# EAGLE board Stackduino-1.2 (EAGLE 7.3.0)
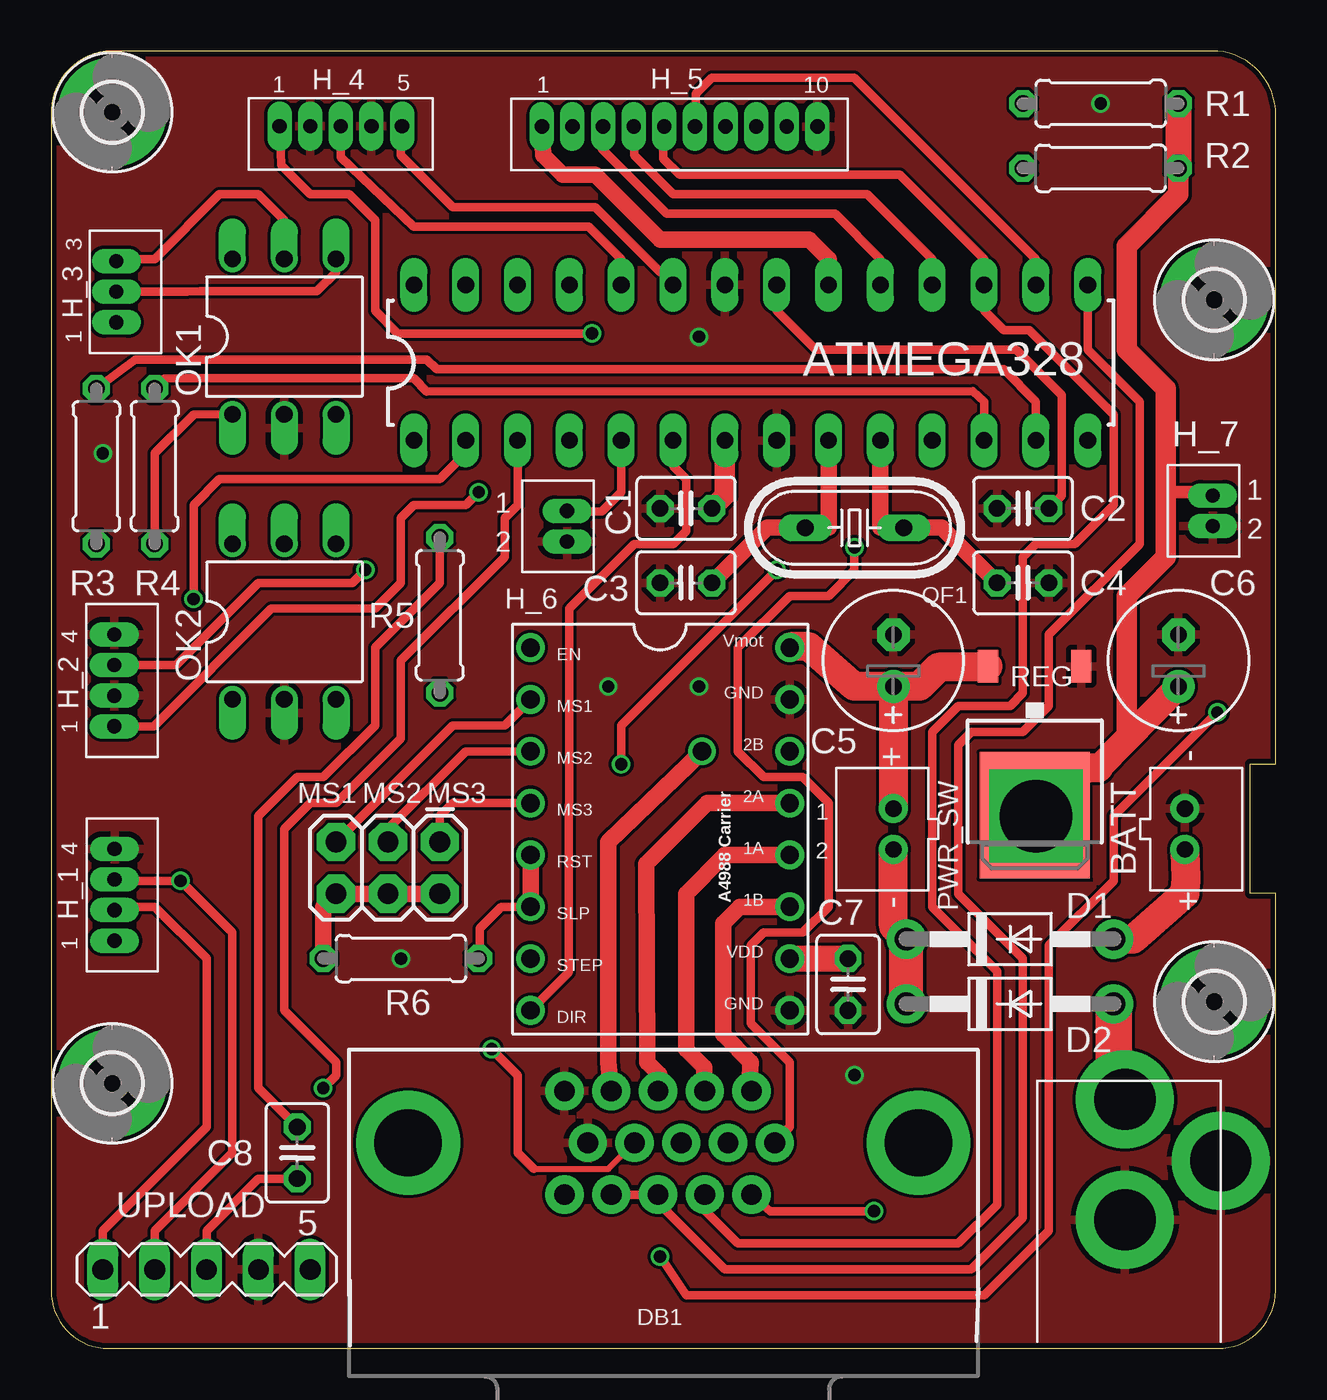
[diagram p0: board, top side]
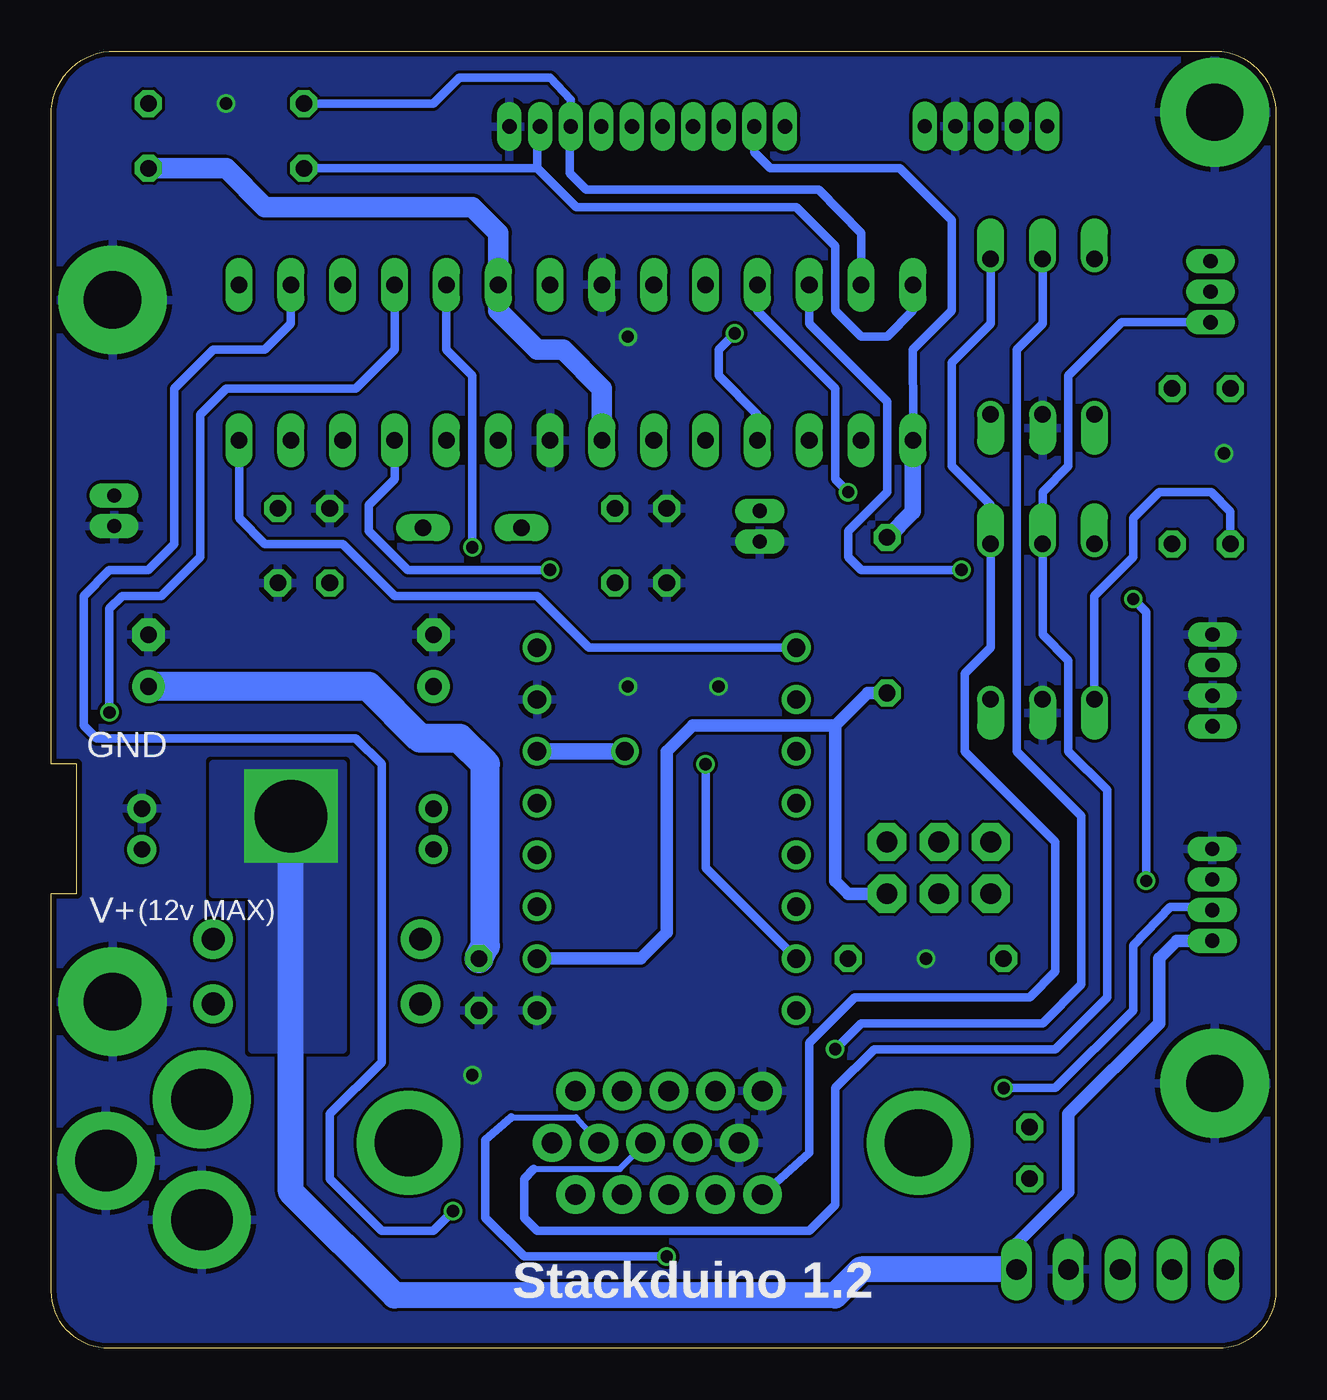
[diagram p1: board, bottom side, seen from below]

Size 60.01 x 63.6 mm. Coordinates in mm from the lower left corner, seen from the top.
Outline: 0,60.46 0,2.83 arc90 2.83,0 57.17,0 arc90 60,2.83 60,22.31 58.75,22.31 58.75,28.65 60,28.65 60,60.17 arc90 57.17,63.6 2.94,63.6 arc90 0,60.46
Copper layers (1*16): Top 0.035mm / dielectric 1.5mm / Bottom 0.035mm
Design rules "SeeedStudio_2layer_DRU_no_angle_20140221": minimum track width 6mil, minimum drill 12mil, track to track 6mil, track to pad 6mil, pad to pad 6mil, via to via 6mil, smd to smd 0mil, copper to edge 10mil, drill to drill 10mil, minimum pad ring 10mil, minimum via ring 6mil, stop-mask expansion 2mil, vias tented up to drill 100mil, thermal gap 10mil
bKeepout: area 45.7,22.9 to 51.4,28.6

## Footprints (pad centres in the part's own frame; a part is rotated, then mirrored left to right if it is on the bottom)
A4988BREAKOUT = drill 0.9: 1A 8.89,1.27; 1B 11.43,1.27; 2A 6.35,1.27; 2B 3.81,1.27; DIR 16.51,-11.43; EN -1.27,-11.43; GND 16.51,1.27; GND@0 1.27,1.27; MS1 1.27,-11.43; MS2 3.81,-11.43; MS3 6.35,-11.43; RST 8.89,-11.43; SLP 11.43,-11.43; STEP 13.97,-11.43; VDD 13.97,1.27; VMOT -1.27,1.27
DIL28-3 = drill 0.813 long: 1 -16.51,-3.81; 2 -13.97,-3.81; 3 -11.43,-3.81; 4 -8.89,-3.81; 5 -6.35,-3.81; 6 -3.81,-3.81; 7 -1.27,-3.81; 8 1.27,-3.81; 9 3.81,-3.81; 10 6.35,-3.81; 11 8.89,-3.81; 12 11.43,-3.81; 13 13.97,-3.81; 14 16.51,-3.81; 15 16.51,3.81; 16 13.97,3.81; 17 11.43,3.81; 18 8.89,3.81; 19 6.35,3.81; 20 3.81,3.81; 21 1.27,3.81; 22 -1.27,3.81; 23 -3.81,3.81; 24 -6.35,3.81; 25 -8.89,3.81; 26 -11.43,3.81; 27 -13.97,3.81; 28 -16.51,3.81
JST-PH-2-THM = drill 0.8 pad 1.422: 1 1,0; 2 -1,0
C025-030X050 = drill 0.813 octagon: 1 -1.27,0; 2 1.27,0
E2,5-7 = drill 0.813 pad 1.6: + -1.27,0 | drill 0.813 pad 1.6 octagon: - 1.27,0
DO41-10 = drill 1.118 pad 1.93: A 5.08,0; C -5.08,0
DB15 = drill 1.016 pad 1.88: 1 -4.32,-7.62; 2 -2.03,-7.62; 3 0.26,-7.62; 4 2.55,-7.62; 5 4.84,-7.62; 6 -5.46,-5.08; 7 -3.17,-5.08; 8 -0.88,-5.08; 9 1.41,-5.08; 10 3.7,-5.08; 11 -4.32,-2.54; 12 -2.03,-2.54; 13 0.26,-2.54; 14 2.55,-2.54; 15 4.84,-2.54 | drill 3.302 pad 5.08: G1 -12.5,-5.08; G2 12.5,-5.08
PJ-102A = drill 3 pad 4.8: RING 0.1,-3.39; RING_SW -4.6,-6.29; TIP 0.1,-9.29
2,8-PAD = drill 2.8 pad 5.334: B2,8 0,0
B4B-ZR = drill 0.7 long: 1 6,-1.3; 2 4.5,-1.3; 3 3,-1.3; 4 1.5,-1.3
B3B-ZR = drill 0.7 pad 1.1 long: 1 -1.5,0; 2 0,0; 3 1.5,0
B5B-ZR = drill 0.7 long: 1 3,0.013; 2 1.5,0.013; 3 0,0.013; 4 -1.5,0.013; 5 -3,0.013
B10B-ZR = drill 0.7 long: 1 6.751,-0.005; 2 5.251,-0.005; 3 3.751,-0.005; 4 2.251,-0.005; 5 0.751,-0.005; 6 -0.749,-0.005; 7 -2.249,-0.005; 8 -3.749,-0.005; 9 -5.249,-0.005; 10 -6.749,-0.005
B2B-ZR = drill 0.7 pad 1.1 long: 1 0.92,-0.75; 2 2.42,-0.75
2X3 = drill 1.016 pad 1.88 octagon: 1 0,0; 2 0,2.54; 3 2.54,0; 4 2.54,2.54; 5 5.08,0; 6 5.08,2.54
DIL06 = drill 0.813 offset: 1 -2.54,-3.81; 2 0,-3.81; 3 2.54,-3.81; 4 2.54,3.81; 5 0,3.81; 6 -2.54,3.81
HC49U-V = drill 0.813 long: 1 -2.413,0; 2 2.413,0
0207/7 = drill 0.813 octagon: 1 -3.81,0; 2 3.81,0
DPACK = smd 1 x 1.6: 1 -2.28,-4.8; 3 2.28,-4.8 | smd 5.4 x 6.2: 2 0,2.5
MA05-1 = drill 1.016 long: 1 -5.08,0; 2 -2.54,0; 3 0,0; 4 2.54,0; 5 5.08,0

## Placement (x,y rotation side)
A4988_CARRIER  A4988BREAKOUT  [A4988BREAKOUT]  34.92,33.09 270 top
ATMEGA328  ATMEGA328P_PDIP  [DIL28-3]  34.29,48.33 0 top
BATT  [JST-PH-2-THM]  55.56,25.47 270 top
C1  0.1uF  [C025-030X050]  31.11,41.18 180 top
C2  0.1uF  [C025-030X050]  47.62,41.18 0 top
C3  22pF  [C025-030X050]  31.11,37.53 180 top
C4  22pF  [C025-030X050]  47.62,37.53 0 top
C5  100uF  [E2,5-7]  41.27,33.72 90 top
C6  100uF  [E2,5-7]  55.24,33.72 90 top
C7  0.1uF  [C025-030X050]  39.05,17.84 270 top
C8  0.1uF  [C025-030X050]  12.06,9.59 270 top
D1  20v 1A  [DO41-10]  46.99,20.07 0 top
D2  20v 1A  [DO41-10]  46.99,16.89 0 top
DB1  DB15  [DB15]  30,5 180 top
DC_SOCKET  2.1MMJACKTHM  [PJ-102A]  52.72,2.92 180 top
H1  MOUNT-PAD-ROUND2.8  [2,8-PAD]  3,60.6 180 top
H2  MOUNT-PAD-ROUND2.8  [2,8-PAD]  57,51.4 180 top
H3  MOUNT-PAD-ROUND2.8  [2,8-PAD]  57,17 180 top
H4  MOUNT-PAD-ROUND2.8  [2,8-PAD]  3,13 180 top
H_1  B4B-ZR  [B4B-ZR]  1.81,18.49 90 top
H_2  B4B-ZR  [B4B-ZR]  1.8,29 90 top
H_3  B3B-ZR  [B3B-ZR]  3.2,51.8 90 top
H_4  B5B-ZR  [B5B-ZR]  14.2,59.9 0 top
H_5  B10B-ZR  [B10B-ZR]  30.8,59.9 0 top
H_6  B2B-ZR  [B2B-ZR]  26.04,41.98 270 top
H_7  B2B-ZR  [B2B-ZR]  57.67,42.73 270 top
MS_PINS  [2X3]  19.05,24.83 180 top
OK1  4N35  [DIL06]  11.43,49.59 0 top
OK2  4N35  [DIL06]  11.43,35.62 0 top
PWR_SW  [JST-PH-2-THM]  41.27,25.47 90 top
QF1  8Mhz  [HC49U-V]  39.37,40.23 0 top
R1  4.7K  [0207/7]  51.44,61.03 180 top
R2  4.7K  [0207/7]  51.44,57.85 0 top
R3  220 Ohm  [0207/7]  2.22,43.24 90 top
R4  220 Ohm  [0207/7]  5.08,43.24 90 top
R5  10K  [0207/7]  19.05,35.94 270 top
R6  100K  [0207/7]  17.14,19.11 180 top
REG  MC33269D-5.0  [DPACK]  48.2,28.63 180 top
UPLOAD  [MA05-1]  7.62,3.88 0 top

## Library data of the parts
A4988_CARRIER = RepRapjr
ATMEGA328 = SparkFun-DigitalIC
BATT D1 D2 DC_SOCKET PWR_SW = adafruit
C1-C4 C7 C8 R1-R6 = resistor
C5 C6 = rcl
DB1 = SparkFun-Connectors
H1-H4 = holes
H_1-H_7 = jst-connectors
MS_PINS = SparkFun-Connectors; PROD_ID: CONN-09701
OK1 OK2 = optocoupler; MF: FAIRCHILD SEMICONDUCTOR; MPN: 4N35; OC_FARNELL: 1328375; OC_NEWARK: 72K9946
QF1 = crystal; OC_FARNELL: 1666969; OC_NEWARK: unknown
REG = linear
UPLOAD = con-lstb; OC_FARNELL: unknown; OC_NEWARK: unknown

## Nets
A4988_RESET: A4988_CARRIER.RST A4988_CARRIER.SLP R6.1
ACVIN: D2.A DC_SOCKET.TIP
BATTVIN: BATT.1 D1.A
BWD: ATMEGA328.26 H_2.2
CAM_GND: DB1.15 H_3.2 OK1.4 OK2.4
DIR: A4988_CARRIER.DIR ATMEGA328.6
ENABLE: A4988_CARRIER.EN ATMEGA328.14
ENC_A: ATMEGA328.23 H_4.1
ENC_B: ATMEGA328.24 H_4.3
ENCSWITCH: ATMEGA328.4 H_4.5
FWD: ATMEGA328.25 H_2.4
GND: A4988_CARRIER.GND A4988_CARRIER.GND@0 ATMEGA328.8 ATMEGA328.22 BATT.2 C1.2 C2.1 C3.2 C4.2 C5.- C6.- C7.2 DB1.5 DB1.10 DC_SOCKET.RING DC_SOCKET.RING_SW H1.B2,8 H2.B2,8 H3.B2,8 H4.B2,8 H_1.1 H_2.1 H_2.3 H_4.2 H_4.4 H_5.1 H_6.2 H_7.2 OK1.2 OK2.2 REG.1 UPLOAD.4
I2C_SCL: ATMEGA328.28 H_5.2 R2.1
I2C_SDA: ATMEGA328.27 H_5.3 R1.2
LIM1: ATMEGA328.15 DB1.13 DB1.14
MCU_RX: ATMEGA328.2 H_1.2 UPLOAD.2
MCU_TX: ATMEGA328.3 H_1.3 UPLOAD.1
MISO: ATMEGA328.18 DB1.7 H_5.7
MOSI: ATMEGA328.17 DB1.12 H_5.6
MS1: A4988_CARRIER.MS1 MS_PINS.5
MS2: A4988_CARRIER.MS2 MS_PINS.3
MS3: A4988_CARRIER.MS3 MS_PINS.1
N$2: D1.C D2.C PWR_SW.2
N$3: ATMEGA328.1 C8.1 H_5.9 R5.1
N$4: C8.2 UPLOAD.3
N$11: ATMEGA328.21 C2.2
OPT1: DB1.8 H_3.1 OK2.5
OPT1_IN: OK2.1 R3.1
OPT1_MCU: ATMEGA328.13 R3.2
OPT2: DB1.9 H_3.3 OK1.5
OPT2_IN: OK1.1 R4.1
OPT2_MCU: ATMEGA328.12 R4.2
OUT1A: A4988_CARRIER.1B DB1.1
OUT1B: A4988_CARRIER.1A DB1.2
OUT2A: A4988_CARRIER.2A DB1.3
OUT2B: A4988_CARRIER.2B DB1.4
SCK: ATMEGA328.19 DB1.6 H_5.8
SS: ATMEGA328.16 DB1.11 H_5.5
START_STOP: ATMEGA328.5 H_6.1
STEP: A4988_CARRIER.STEP ATMEGA328.11
VCC: A4988_CARRIER.VDD ATMEGA328.7 ATMEGA328.20 C1.1 C6.+ C7.1 H_1.4 H_5.10 H_7.1 MS_PINS.2 MS_PINS.4 MS_PINS.6 R1.1 R2.2 R5.2 R6.2 REG.2 UPLOAD.5
VIN: A4988_CARRIER.VMOT C5.+ PWR_SW.1 REG.3
XTAL1: ATMEGA328.9 C3.1 QF1.1
XTAL2: ATMEGA328.10 C4.1 QF1.2

## Tracks (layer width: path | path; a pad name or v marks a point on that pad's centre or on a via)
A4988_RESET
  Top 0.406: A4988_CARRIER.SLP 22.05,21.66 21,20.6 21,19.66 R6.1
  Top 0.813: A4988_CARRIER.RST A4988_CARRIER.SLP
ACVIN
  Top 1.778: DC_SOCKET.TIP 52.07,13.4 D2.A
BATTVIN
  Top 1.422: D1.A 53.02,20.07 55.56,22.3 55.62,22.94 55.6,23.87 BATT.1
BWD  (via drill 0.6)
  Top 0.406: v15.4,38.16 14.76,37.53 10.16,37.53 6.13,33.5 H_2.2
  Bottom 0.406: ATMEGA328.26 22.86,50.23 19.05,46.42 19.05,41.98 20.95,40.07 20.95,38.8 20.32,38.16 v15.4,38.16
CAM_GND
  Top 0.406: H_3.2 3.81,51.82 3.81,51.8 6.68,51.8 7.3,51.82 13.02,51.82 13.97,52.77 OK1.4
  Bottom 0.406: OK1.4 13.97,50.23 15.88,48.33 15.88,43.24 13.97,41.34 OK2.4 13.97,34.35 15.24,33.09 15.24,29.27 10.79,24.83 10.79,18.48 12.06,17.21 20.64,17.21 22.86,14.99 22.86,9.59 DB1.15
DIR
  Top 0.406: ATMEGA328.6 30.48,43.24 31.11,42.61 31.11,40.07 30.48,39.44 28.57,39.44 25.4,36.26 25.4,34.99 25.36,18.45 A4988_CARRIER.DIR
ENABLE
  Bottom 0.406: 23.45,34.4 A4988_CARRIER.EN 33.66,34.35 36.2,36.9 43.18,36.9 45.72,39.44 49.53,39.44 50.8,40.7 ATMEGA328.14
ENC_A
  Top 0.406: ATMEGA328.23 30.48,52.77 29.84,52.77 26.67,55.94 19.68,55.94 17.14,58.48 17.14,59.75 H_4.1
ENC_B
  Top 0.406: ATMEGA328.24 27.94,53.41 26.35,54.99 17.78,54.99 14.2,58.4 H_4.3
ENCSWITCH  (via drill 0.6)
  Top 0.406: H_4.5 11.27,58.01 12.7,56.58 14.61,56.58 15.88,55.31 15.88,50.87 16.99,49.75 v26.51,49.75
  Bottom 0.406: v26.51,49.75 27.3,48.96 27.3,47.69 25.4,45.78 ATMEGA328.4
FWD  (via drill 0.6)
  Top 0.406: H_2.4 5.04,30.5 10.79,36.26 15.88,36.26 17.14,37.53 17.14,40.7 17.78,41.34 20.32,41.34 v20.95,41.98
  Bottom 0.406: v20.95,41.98 21.59,42.61 21.59,47.05 25.4,50.87 ATMEGA328.25
GND  (via drill 0.6)
  other vias: 31.75,49.59 2.54,43.88 51.44,61.03 27.3,32.45 31.75,32.45 17.14,19.11 39.37,13.4
  pour Top: -1.27,64.83 -1.27,0.7 1.27,-1.84 59.05,-1.84 62.23,1.34 62.23,64.2
  pour Bottom (rank 2): -0.64,66.74 60.33,66.74 64.14,62.93 64.14,-0.57 60.33,-4.38 0.64,-4.38 -5.08,1.34 -5.08,62.3
I2C_SCL
  Bottom 0.406: 36.2,57.85 34.29,55.94 23.5,55.94 21.59,54.04 21.59,50.87 20.32,49.59 19.05,49.59 17.78,50.87 ATMEGA328.28 | 36.2,57.85 36.2,59.75 H_5.2 | R2.1 36.2,57.85
I2C_SDA
  Bottom 0.406: ATMEGA328.27 20.32,54.67 22.4,56.8 33.8,56.8 34.6,57.6 34.6,59.85 H_5.3 34.56,60.05 34.56,61.2 35.56,62.3 40.01,62.3 41.27,61.03 R1.2
LIM1
  Top 0.406: DB1.14 DB1.13 29.84,7.43 29.84,7.05 33.02,3.88 45.09,3.88 47.62,6.41 47.62,19.11 44.45,22.29 44.45,29.59 45.09,30.23 47.62,30.23 48.9,31.5 48.9,34.99 53.34,39.44 53.34,46.42 50.8,48.96 ATMEGA328.15
MCU_RX  (via drill 0.6)
  Top 0.406: UPLOAD.2 5.08,5.78 8.89,9.59 8.89,20.38 v6.35,22.92 3.81,22.92 3.12,23 H_1.2 | ATMEGA328.2 20.32,43.88 19.05,42.61 8.26,42.61 6.99,41.34 v6.99,36.74
  Bottom 0.406: v6.99,36.74 6.35,36.1 v6.35,22.92
MCU_TX  (via drill 0.6)
  Top 0.406: UPLOAD.1 2.54,5.78 7.62,10.86 7.62,19.11 5.08,21.66 3.81,21.66 H_1.3 | ATMEGA328.3 22.86,41.34 22.23,40.7 22.23,38.8 17.14,33.72 17.14,29.91 13.97,26.73 12.7,26.73 11.43,25.47 11.43,16.57 13.97,14.04 13.97,13.4 v13.34,12.77
  Bottom 0.406: v13.34,12.77 10.79,12.77 6.99,16.57 6.99,19.75 5.18,21.66 3.81,21.66 H_1.3
MISO  (via drill 0.6)
  Top 0.406: ATMEGA328.18 43.18,53.41 40.01,56.58 30.48,56.58 28.57,58.48 28.6,59.85 H_5.7 | v57.15,31.18 52.07,26.1 52.07,22.92 48.9,19.75 48.9,5.78 45.72,2.61 31.11,2.61 v29.84,4.51
  Bottom 0.305: 37.47,11.34 34.29,11.34 DB1.7
  Bottom 0.406: v57.15,31.18 57.15,36.26 56.52,36.9 54.61,36.9 52.7,38.8 52.7,45.78 51.44,47.05 45.09,47.05 43.18,48.96 ATMEGA328.18 | v29.84,4.51 36.83,4.51 38.73,6.41 38.73,10.23 37.47,11.34
MOSI
  Top 0.406: H_5.6 30,59.84 30,58.33 30.8,57.53 41.59,57.53 45.72,53.41 ATMEGA328.17 45.72,50.87 46.67,49.91 47.94,49.91 52.07,45.78 52.07,41.34 50.16,39.44 48.26,39.44 47.62,38.8 47.62,32.13 46.99,31.5 44.45,31.5 43.18,30.23 43.18,21.66 46.35,18.48 46.35,7.05 44.45,5.14 33.66,5.14 32.03,6.77 DB1.12
MS1
  Top 0.406: A4988_CARRIER.MS1 22.23,30.55 19.68,30.55 MS_PINS.5
MS2
  Top 0.406: A4988_CARRIER.MS2 20.32,29.27 16.51,25.47 MS_PINS.3
MS3
  Top 0.406: A4988_CARRIER.MS3 19.68,26.73 19.05,26.1 MS_PINS.1
N$2
  Top 1.422: D1.C 41.27,20.7 PWR_SW.2
  Top 1.676: D2.C D1.C
N$3
  Top 0.406: R5.1 19.05,37.53 15.88,34.35 15.88,30.55 13.34,28.01 12.06,28.01 10.16,26.1 10.16,12.77 C8.1
  Bottom 0.406: H_5.9 25.56,59.44 25.56,58.64 24.77,57.85 18.41,57.85 15.88,55.31 15.88,50.87 17.78,48.96 arc-1 17.77,45.5 ATMEGA328.1
  Bottom 0.813: ATMEGA328.1 17.78,41.02 R5.1
N$4
  Top 0.406: UPLOAD.3 7.62,5.78 10.16,8.32 C8.2
N$11
  Top 0.406: ATMEGA328.21 35.56,50.87 37.47,48.96 47.31,48.96 49.53,46.74 49.53,41.82 C2.2
OPT1
  Bottom 0.305: 36.35,8.8 32.14,8.8 DB1.8
  Bottom 0.406: H_3.1 7.55,50.3 10.16,47.69 10.16,43.24 11.43,41.98 OK2.5 11.43,34.99 10.16,33.72 10.16,29.27 8.26,27.37 8.26,17.21 10.79,14.67 19.68,14.67 21.59,12.77 21.59,7.05 22.86,5.78 36.2,5.78 36.83,6.41 36.83,8.32 36.35,8.8
OPT1_IN
  Bottom 0.406: OK2.1 8.89,36.9 6.99,38.8 6.99,40.7 5.71,41.98 3.17,41.98 2.22,41.02 R3.1
OPT1_MCU
  Top 0.406: ATMEGA328.13 48.26,46.42 46.67,48.01 18.89,48.01 18.41,48.48 4.13,48.48 R3.2
OPT2  (via drill 0.6)
  Top 0.305: 23.65,8.8 27.31,8.8 DB1.9
  Top 0.406: OK1.5 11.43,55.31 10.16,56.58 8.26,56.58 5.08,53.41 3.81,53.41 H_3.3 | v21.59,14.67 22.86,13.4 22.86,9.59 23.65,8.8
  Bottom 0.406: OK1.5 11.43,50.23 12.7,48.96 12.7,29.27 9.53,26.1 9.53,17.84 11.43,15.94 20.32,15.94 v21.59,14.67
OPT2_IN
  Top 0.406: R4.1 5.08,43.88 6.99,45.78 8.41,45.8 OK1.1
OPT2_MCU
  Top 0.406: ATMEGA328.12 45.72,46.42 45.16,46.93 18.41,46.9 17.78,47.56 6.63,47.56 5.56,47.53 R4.2
OUT1A
  Top 0.813: A4988_CARRIER.1B 33.75,21.66 32.93,20.84 32.93,15.39 34.29,14.04 34.2,12.74 DB1.1
OUT1B
  Top 0.813: A4988_CARRIER.1A 33.02,24.2 31.11,22.29 31.11,14.67 32,13.79 32,12.65 DB1.2
OUT2A
  Top 0.813: A4988_CARRIER.2A 32.16,26.73 29.16,23.74 29.21,14.04 29.8,13.45 29.8,12.68 DB1.3
OUT2B  (via drill 0.9)
  Top 0.813: v31.9,29.27 27.3,24.83 27.3,14.04 DB1.4
  Bottom 0.813: A4988_CARRIER.2B v31.9,29.27
SCK  (via drill 0.6)
  Top 0.406: ATMEGA328.19 40.64,53.41 38.42,55.63 30.16,55.63 26.99,58.8 27,59.84 H_5.8 | v39.37,39.28 39.37,38.16 38.1,36.9 36.2,36.9 33.66,34.35 33.66,29.27 34.92,28.01 36.83,28.01 38.1,26.73 38.1,21.66 36.83,20.38 34.92,20.38 34.29,19.75 34.29,15.94 36.2,14.04 36.2,10.86 35.56,10.23 DB1.6
  Bottom 0.406: v39.37,39.28 39.37,47.69 40.64,48.96 ATMEGA328.19
SS  (via drill 0.6)
  Top 0.406: ATMEGA328.16 48.26,53.41 39.37,62.3 32.38,62.3 31.59,61.5 31.56,60.38 H_5.5 | v40.32,6.73 35.24,6.73 DB1.11
  Bottom 0.406: ATMEGA328.16 48.26,50.23 49.53,48.96 52.07,48.96 53.98,47.05 53.98,39.44 55.24,38.16 57.15,38.16 58.42,36.9 58.42,30.55 57.78,29.91 45.09,29.91 43.81,28.64 43.81,14.04 46.35,11.5 46.35,8.32 43.81,5.78 41.27,5.78 v40.32,6.73
START_STOP
  Top 0.406: ATMEGA328.5 27.94,41.98 26.99,41.02 26.04,41.02 H_6.1
STEP  (via drill 0.6)
  Top 0.406: v35.56,38.16 27.94,30.55 v27.94,28.64
  Bottom 0.406: ATMEGA328.11 43.18,42.61 44.45,41.34 44.45,40.07 42.55,38.16 v35.56,38.16 | v27.94,28.64 27.94,23.56 A4988_CARRIER.STEP
VCC  (via drill 3.56)
  Top 0.406: 50.8,28.47 50.16,27.37 50.16,26.77 REG.2 48.26,26.13 v48.26,26.1
  Top 0.61: 54.61,41.98 56.12,41.98 H_7.1 | C6.+ 52.7,29.91
  Top 0.813: MS_PINS.2 MS_PINS.4 MS_PINS.6 13.34,21.66 R6.2 | H_5.10 24.13,58.48 25.08,57.53 26.67,57.53 29.84,54.36 37.15,54.36 38.1,53.41 ATMEGA328.20
  Top 1.016: ATMEGA328.7 33.02,41.82 C1.1 | R2.2 55.24,56.58 52.7,54.04 52.7,48.96 54.61,47.05 54.61,41.98 54.61,38.8 52.7,36.9 52.7,29.91
  Top 1.27: A4988_CARRIER.VDD C7.1 | C6.+ 51.33,28.47 | R1.1 R2.2
  Top 1.422: 48.84,27.2 50.8,28.47 51.33,28.47
  Bottom 0.61: MS_PINS.2 20.95,22.29 21.59,22.92 21.59,30.55 | 21.59,30.55 20,32.13 R5.2 | A4988_CARRIER.VDD 31.11,19.11 29.84,20.38 29.84,29.27 28.57,30.55 21.59,30.55 | H_1.4 4.84,19.99 5.71,19.11 5.71,15.94 10.16,11.5 10.16,7.68 12.7,5.14 UPLOAD.5
  Bottom 1.016: ATMEGA328.7 33.02,47.05 34.92,48.96 36.2,48.96 38.1,50.87 ATMEGA328.20 38.1,54.67 39.37,55.94 49.53,55.94 51.44,57.85 R2.2
  Bottom 1.27: UPLOAD.5 20.32,3.88 21.59,2.61 43.18,2.61 48.26,7.68 v48.26,26.1
  Bottom 1.422: C7.1 38.73,19.75 38.73,28.64 40.01,29.91 41.91,29.91 44.45,32.45 C6.+
  pour Bottom: 45.72,28.64 52.07,28.64 52.07,22.29 50.16,22.29 50.16,14.67 45.72,14.67
VIN
  Top 0.61: 36.24,34.4 A4988_CARRIER.VMOT
  Top 1.422: REG.3 45.56,33.4 43.5,33.4 42.55,32.45 C5.+ | C5.+ PWR_SW.1 | C5.+ 39.37,32.45 37.13,34.4 36.24,34.4
XTAL1
  Top 0.813: ATMEGA328.9 38.1,40.23 QF1.1 35.08,40.23 C3.1
XTAL2
  Top 0.813: ATMEGA328.10 40.64,40.23 QF1.2 43.66,40.23 C4.1

## Text on the board
tPlace: A4988 Carrier
bPlace: Stackduino 1.2
bNames: GND | (12v MAX) | V+
_tsilk: 1 | 5 | 1 | 10 | 3 | 1 | 1 | 1 | 2 | 2 | 4 | 1 | MS1 | MS2 | MS3 | 1 | 2 | 4 | 1